# Altium PCB LED_SEQUENCER.PcbDoc
Units mm, origin at the board's own origin, x right, y up, seen from the top; angles counter-clockwise.
Board outline 51.5 x 28.5 mm, 2 copper layers (Top Layer, Bottom Layer), stack 1.671 mm thick; 28 components, 26 nets, 77 pads, 14 vias.
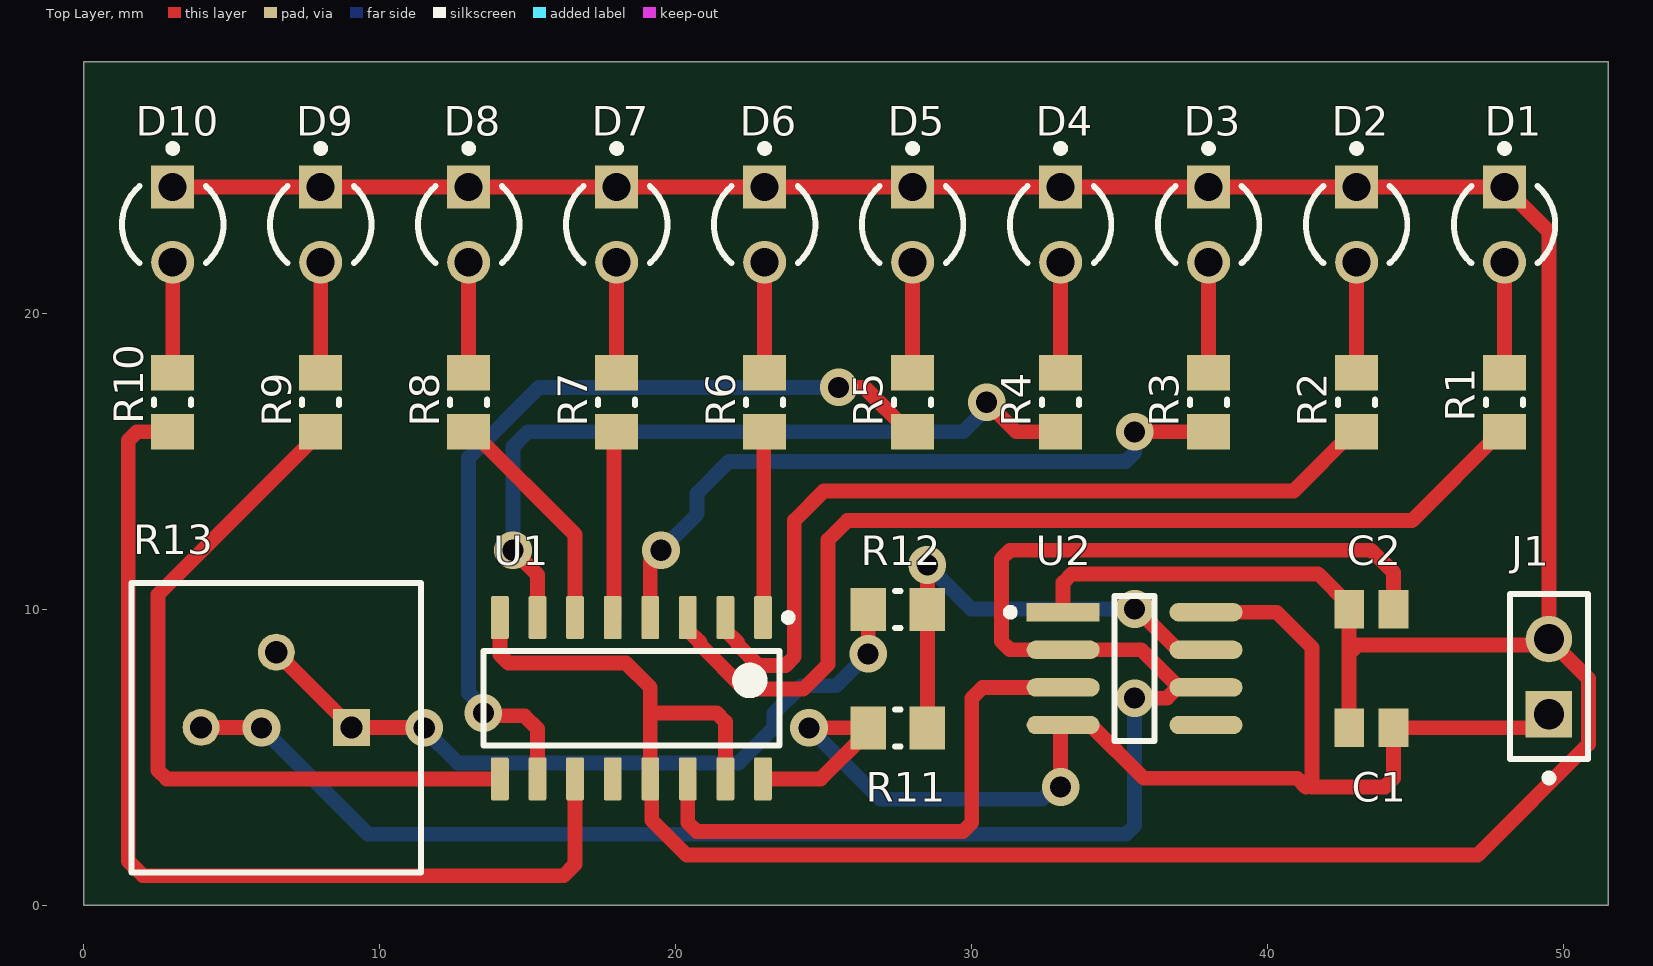
[diagram p0: Top Layer view]
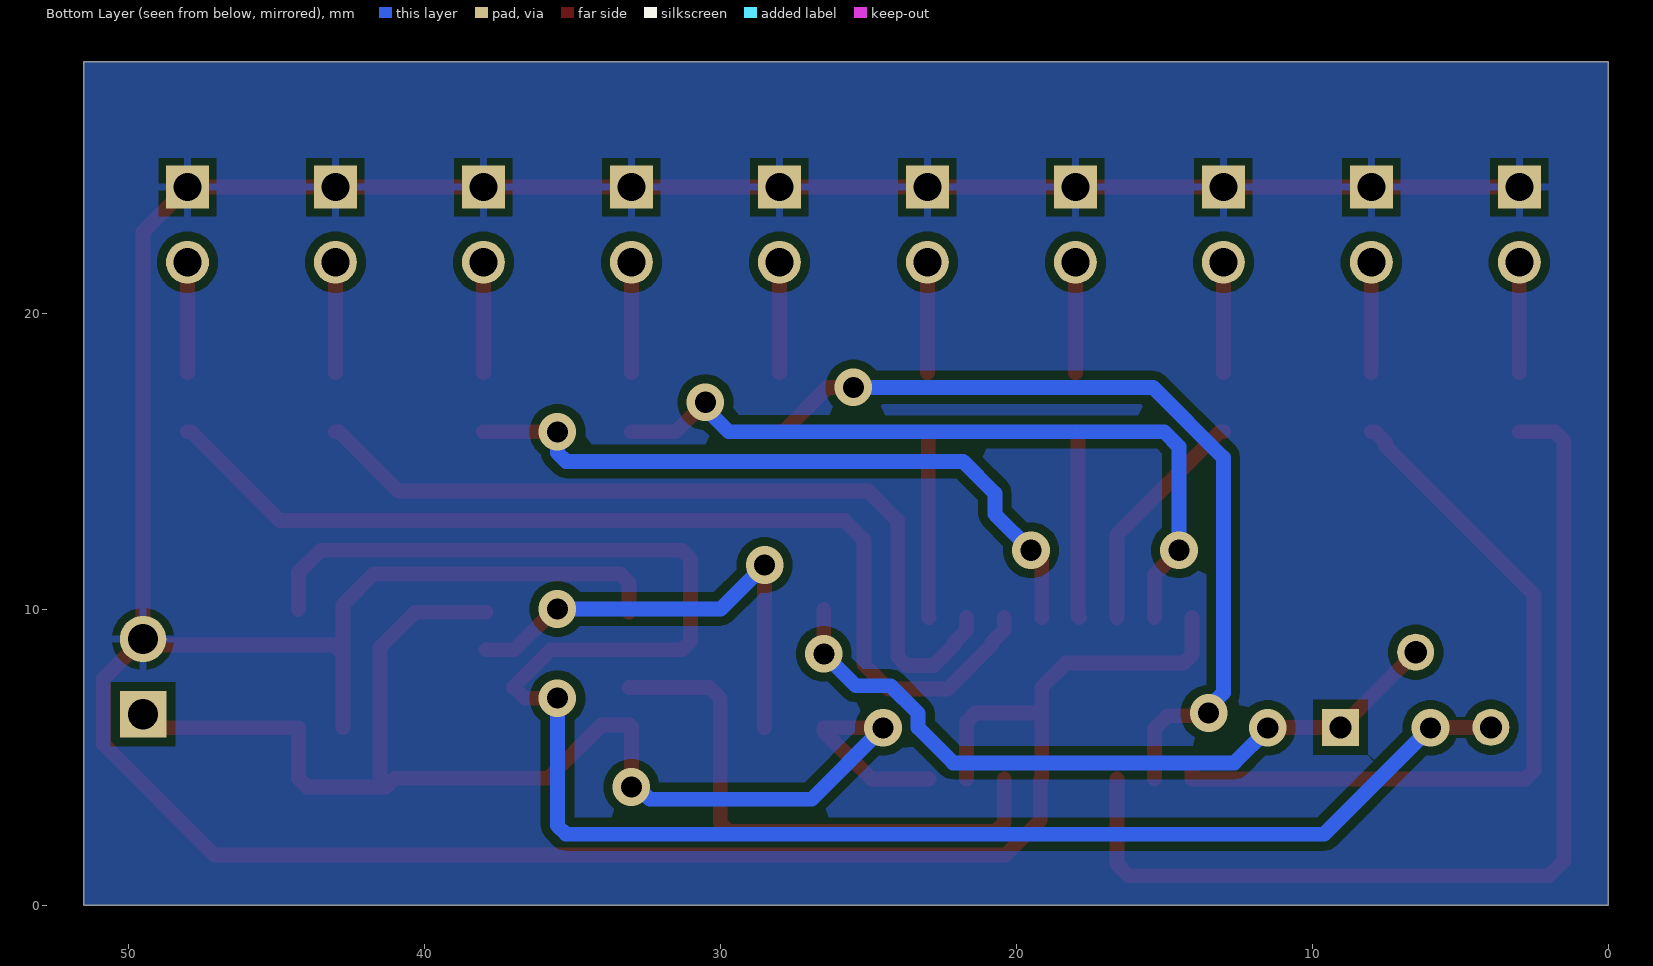
[diagram p1: Bottom Layer view, seen from below]
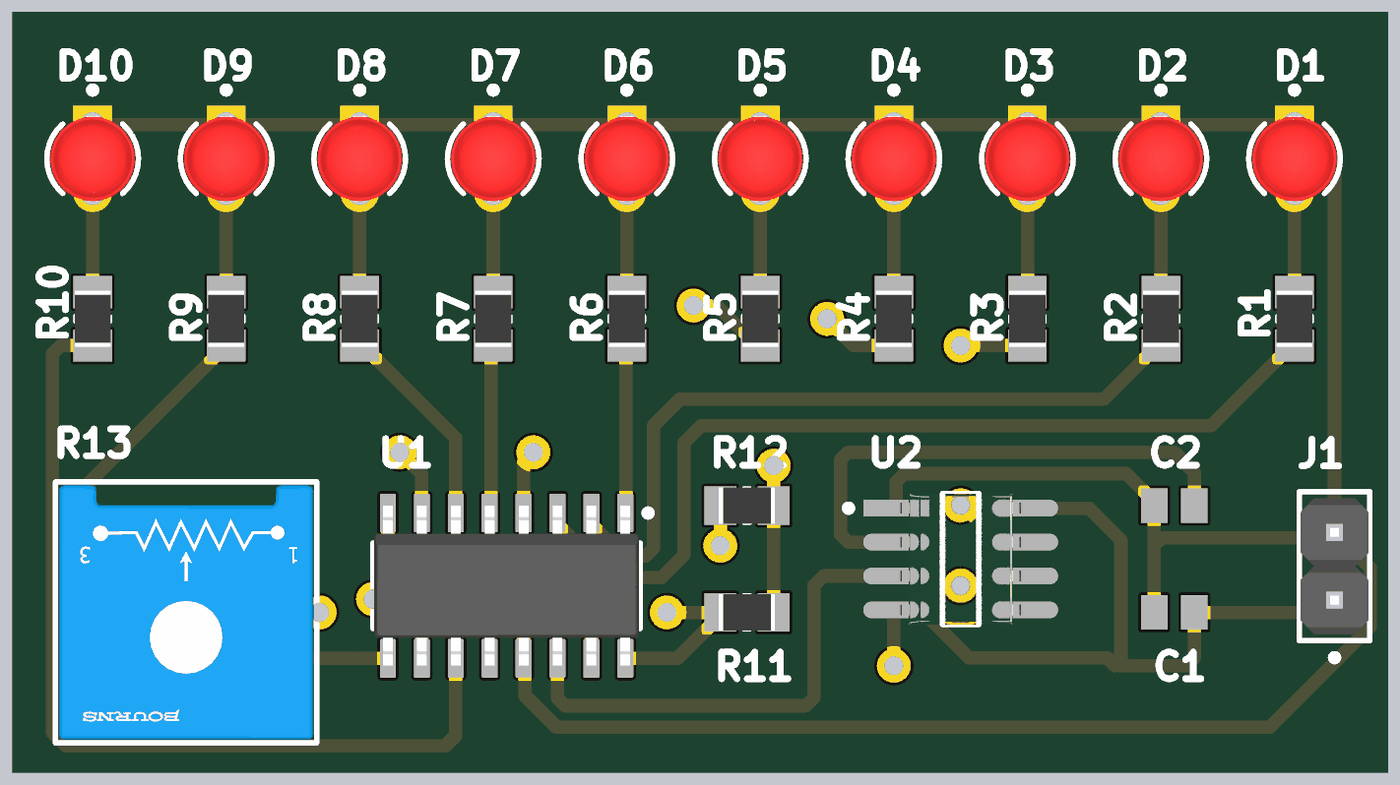
[diagram p2: 3D render of the assembled board from above, using the file's embedded part models]

## Layer stack, top to bottom
Top Solder: solder mask 0.0102, Solder Resist, Dk 3.5
Top Layer: signal copper 0.0356
Dielectric 1: dielectric 1.6, FR-4, Dk 4.8
Bottom Layer: signal copper 0.0356
Bottom Solder: solder mask 0.0102, Solder Resist, Dk 3.5

## Board outline
0,28.5 51.5,28.5 51.5,0 0,0

## Design rules (kind name [scope] priority, off if disabled: settings)
Clearance [All] p1: gap=0.3 ignorepadtopadclearanceinfootprint=FALSE
PolygonConnect [All] p1: connectstyle=Relief reliefconductorwidth=0.254 reliefentries=4 polygonreliefangle="90 Angle" airgapwidth=0.254
RoutingVias [All] p1: holewidth=0.3 width=0.6 viastyle="Through Hole" minholewidth=0.3 minwidth=0.6 maxholewidth=0.3 maxwidth=0.6
SilkToSolderMaskClearance [IsPad] p1: minsilkscreentomaskgap=0.1 clearancetoexposedcopper=TRUE
SolderMaskExpansion [All] p1: expansion=0.102 istentingtop=FALSE
SupplyNets "Schematic Supply Nets_1" [InNet('GND')] p1: voltage=0.000
SupplyNets "Schematic Supply Nets" [InNet('VCC')] p2: voltage=0.000
UnRoutedNet [All] p1: checkbadconnections=TRUE
Width [All] p1: maxlimit=1 minlimit=0.3 preferedwidth=0.5
28 further rules are at their usual default settings.

## Components (designator, comment, footprint, x,y, rotation, side; value= is the part's Value field where it differs from the comment)
C1 "GRM21BR71H105KA12L" CAPC2013X135X45LL10T25 43.5,6 r0 top
C2 "GRM21BR71H105KA12L" CAPC2013X135X45LL10T25 43.5,10 r0 top
D1 "HLMP-1301" FP-HLMP-1301-MFG 48,23 r270 top
D2 "HLMP-1301" FP-HLMP-1301-MFG 43,23 r270 top
D3 "HLMP-1301" FP-HLMP-1301-MFG 38,23 r270 top
D4 "HLMP-1301" FP-HLMP-1301-MFG 33,23 r270 top
D5 "HLMP-1301" FP-HLMP-1301-MFG 28,23 r270 top
D6 "HLMP-1301" FP-HLMP-1301-MFG 23,23 r270 top
D7 "HLMP-1301" FP-HLMP-1301-MFG 18,23 r270 top
D8 "HLMP-1301" FP-HLMP-1301-MFG 13,23 r270 top
D9 "HLMP-1301" FP-HLMP-1301-MFG 8,23 r270 top
D10 "HLMP-1301" FP-HLMP-1301-MFG 3,23 r270 top
J1 "M20-9990246" FP-M20-9990246-MFG 49.5,7.73 r90 top
R1 "RC0805FR-071KL" RESC2013X60X35ML10T20 48,17 r90 top
R2 "RC0805FR-071KL" RESC2013X60X35ML10T20 43,17 r90 top
R3 "RC0805FR-071KL" RESC2013X60X35ML10T20 38,17 r90 top
R4 "RC0805FR-071KL" RESC2013X60X35ML10T20 33,17 r90 top
R5 "RC0805FR-071KL" RESC2013X60X35ML10T20 28,17 r90 top
R6 "RC0805FR-071KL" RESC2013X60X35ML10T20 23,17 r90 top
R7 "RC0805FR-071KL" RESC2013X60X35ML10T20 18,17 r90 top
R8 "RC0805FR-071KL" RESC2013X60X35ML10T20 13,17 r90 top
R9 "RC0805FR-071KL" RESC2013X60X35ML10T20 8,17 r90 top
R10 "RC0805FR-071KL" RESC2013X60X35ML10T20 3,17 r90 top
R11 "RC0805FR-071KL" RESC2013X60X35ML10T20 27.5,6 r180 top
R12 "RC0805FR-071KL" RESC2013X60X35ML10T20 27.5,10 r0 top
R13 "3386P-1-104LF" FP-3386P-MFG 6.5,6 r180 top
U1 "CD4017BM" D0016A_N 18.5,7 r270 top
U2 "NE555DR" FP-D0008A-IPC_A 35.5,8 r0 top

## Footprints (in the part's own frame and the unit in brackets; to place one, negate y for a bottom-side part, rotate by r counter-clockwise, add the part's x,y. Pads: shape width x height; smd on the part's side, far side on the other; paste and mask are expansions set on the pad)
CAPC2013X135X45LL10T25 [mm] "Chip Capacitor, 2-Leads, Body 2.00x1.25mm, IPC High Density"
  rect 1x1.3 smd: 1(-0.75,0) 2(0.75,0)
  body extent -1.05,-0.67 1.05,0.68, height 1.35
D0016A_N [mm] "SOIC, 16-Leads, Body 10x4mm, Pitch 1.27mm, IPC Medium Density"
  rrect17% 1.45x0.6 smd: 1(-2.725,4.445) 2(-2.725,3.175) 3(-2.725,1.905) 4(-2.725,0.635) 5(-2.725,-0.635) 6(-2.725,-1.905) 7(-2.725,-3.175) 8(-2.725,-4.445) 9(2.725,-4.445) 10(2.725,-3.175) 11(2.725,-1.905) 12(2.725,-0.635) 13(2.725,0.635) 14(2.725,1.905) 15(2.725,3.175) 16(2.725,4.445)
  silkscreen extent -2.85,-5 1.6,5.42, body extent -3,-4.95 3,4.95, height 1.59
FP-3386P-MFG [mm]
  rect 1.25x1.25 hole 0.75 paste-2539.97 mask+0: 1(-2.54,-0.015)
  round 1.25 hole 0.75 paste-2539.97 mask+0: 2(0,-2.555) 3(2.54,-0.015)
  silkscreen extent -4.89,-4.89 4.89,4.89, body extent -4.99,-4.99 4.99,4.99, height 0.25
FP-D0008A-IPC_A [mm]
  rect 2.469x0.622 smd paste+0 mask+0: 1(-2.414,1.905)
  rrect100% 2.469x0.622 smd paste+0 mask+0: 2(-2.414,0.635) 3(-2.414,-0.635) 4(-2.414,-1.905) 5(2.414,-1.905) 6(2.414,-0.635) 7(2.414,0.635) 8(2.414,1.905)
  silkscreen extent -4.32,-2.45 0.68,2.45, body extent -4.15,-2.95 4.15,2.95, height 0.25
FP-HLMP-1301-MFG [mm]
  rect 1.45x1.45 hole 0.95 paste-2539.97 mask+0: 1(-1.27,0)
  round 1.45 hole 0.95 paste-2539.97 mask+0: 2(1.27,0)
  silkscreen extent -2.7,-1.71 1.3,1.71, body extent -2.22,-2.22 2.22,2.22, height 0.25
FP-M20-9990246-MFG [mm]
  rect 1.57x1.57 hole 1.02 paste-2539.97 mask+0: 1(-1.27,0)
  round 1.57 hole 1.02 paste-2539.97 mask+0: 2(1.27,0)
  silkscreen extent -3.55,-1.32 2.79,1.32, body extent -2.89,-1.42 2.89,1.42, height 0.25
RESC2013X60X35ML10T20 [mm] "Chip Resistor, 2-Leads, Body 2.1x1.35mm, IPC Low Density"
  rect 1.2x1.45 smd: 1(-1,0) 2(1,0)
  silkscreen extent -0.1,-0.63 0.1,0.63, body extent -1.05,-0.68 1.05,0.67, height 0.6

## Part data
C1 C2: library part CMP-1036-04761-2, Manufacturer=Murata, Part Number=GRM21BR71H105KA12L
D1 D2 D3 D4 D5 D6 D7 D8 D9 D10: library part CMP-18399-000007-1, "LED RED DIFFUSED T-1 T/H", Colour=Red, Forward Current=10mA, Forward Voltage=1.9V, Manufacturer=Broadcom, Max Junction Temp=+110°C, Package=0, Reverse Voltage=5V, Temperature="-40°C to +100°C", Temperature Range High=+100°C, Temperature Range Low=-40°C, Automotive=No, Category=Diode, ComponentLink2Description=Datasheet, ComponentLink2URL=https://docs.broadcom.com/docs/AV02-1555EN, Device Class L1=Optoelectronics, Device Class L2=LEDs, Device Class L3=unset, Digikey Description="LED RED DIFFUSED T-1 T/H", Lead Free=Yes, Led Orientation=Straight, Luminous Intensity=3.4mcd, Manufacturer Part Number=HLMP-1301, Mouser Description="Standard LEDs - Through Hole Red Diffused 635nm 3.4mcd", Octopart=https://octopart.com/hlmp-1301-broadcom-71130345, Peak Emmision Wavelength=635nm, RoHS=TRUE, Viewing Angle=60°, Wavelength=626nm
J1: library part CMP-15831-000009-1, "CONN HEADER VERT 2POS 2.54MM", Current Rating=3A, Manufacturer=Harwin, Temperature="-40°C to +105°C", Temperature Range High=+105°C, Temperature Range Low=-40°C, Automotive=No, Category=Conn, ComponentLink2Description=Datasheet, ComponentLink2URL=https://cdn.harwin.com/pdfs/M20-999.pdf, Conn Gender=Male, Conn Orientation=Vertical, Contact Material=Tin,Nickel, Device Class L1=Connectors, Device Class L2="Headers and Wire Housings", Device Class L3=unset, Digikey Description="CONN HEADER VERT 2POS 2.54MM", Height=8.99mm, Lead Free=Yes, Manufacturer Part Number=M20-9990246, Mouser Description="2.54mm (0.1\") Pitch SIL Vertical PC Tail Pin Header, 6.1mm mating pin height, tin, 2 contacts", Number Of Contacts=2, Number Of Rows=1, Octopart=https://octopart.com/m20-9990246-harwin-2590635, Package=M20-9990246, Pitch=2.54mm, RoHS=TRUE
R1 R2 R3 R4 R5 R6 R7 R8 R9 R10 R11 R12: library part CMP-2100-03671-1, "Chip Resistor, 1 KOhm, +/- 1%, 125 mW, -55 to 155 degC, 0805 (2012 Metric), RoHS, Tape and Reel", Case Code (Imperial)=0805, Case Code (Metric)=2012, Manufacturer=Yageo, Max Operating Temperature=155degC, Max Power Dissipation=125mW, Min Operating Temperature=-55degC, Package Description="2-Pin Surface Mounted Device, Body 2 x 1.25 mm", Package Quantity=1, Resistance=1KOhm, Temperature Coefficient=100ppm/degreesC, Tolerance=1%, Voltage Rating=150V, Case/Package=0805, Composition=ThickFilm, Datasheet URL=http://www.yageo.com/NewPortal/yageodocoutput?fileName=/pdf/R-Chip/PYu-RC_Group_51_RoHS_L_5.pdf, Datasheet Version="Rev. 5, 10/2016", Depth=1.25mm, Height=0.024inch, Lead Free=LeadFree, Length=0.079inch, Manufacturer URL=http://www.yageo.com/, Military Standard=Not, Number of Pins=2, Number of Terminations=2, Package Reference=0805, Packaging=TapeandReel, Power Rating=125mW, REACH SVHC=Unknown, RoHSCompliant=true, Termination=SMD/SMT, Voltage Rating (DC)=150V, Width=0.049inch
R13: library part CMP-2000-05592-8, "TRIMMER 100K OHM 0.5W PC PIN TOP", Color=Blue, Manufacturer Series=3386, Max Operating Temperature=125°C, Max Power Dissipation=500mW, Min Operating Temperature=-55°C, Package Quantity=100, Resistance=100kR, Resistance Law=Linear, Resistance Tolerance=10%, Resistor Type=Cermet, Temperature Coefficient=100ppm/°C, Voltage Rating=300V, Actuator Orientation=Vertical, Actuator Type=SCREW, Contact Plating=Tin, Depth=9.53mm, Height=4.83mm, Lead Free="Contains Lead", Length=9.53mm, Military Standard=Not, Mount="Through Hole", Number of Pins=3, Number of Terminals/Pins=3, Number of Turns=1, Packaging=Rail/Tube, Power Rating=500mW, Radiation Hardening=No, Reach SVHC Compliant=Yes, RoHS Compliant=Yes, Series="Trimpot® 3386 - Sealed", Taper=Linear, Technology=CERMET, Terminal Finish=Tin, Termination=Pin, Tolerance=10%, Type=Potentiometer, Weight=0.03oz, Width=9.53mm
U1: library part CMP-1623-00071-2, "CMOS Decade Counter with 10 Decoded Outputs, D0016A, TUBE", F @ Nom Voltage(Max)(Mhz)=8, Generic Part Number=CD4017B, ICC @ Nom Voltage(Max)(mA)=0.03, Manufacturer="Texas Instruments", Operating Temperature Range(C)="-55 to 125", Rating=Military, tpd @ Nom Voltage(Max)(ns)=270, Voltage(Nom)(V)=10, Bits(#)=10, Code_JEDEC="MS-012 variation AC", DatasheetVersion=SCHS027C, Function=Counter, Input Type=CMOS, Inputs=1, Output Drive (IOL/IOH)(Max)(mA)=1.5/-1.5, Output Type=CMOS, PackageReference=D0016A, Schmitt Trigger=No, Technology Family=CD4000, Type=Decade, VCC(Max)(V)=18, VCC(Min)(V)=3
U2: library part CMP-1685-00007-2, "IC OSC SGL TIMER 100KHZ 8-SOIC", Case/Package=SOIC, Frequency=100kHz, High Level Output Current=-200mA, Low Level Output Current=200mA, Max Operating Temperature=70°C, Max Supply Voltage=16V, Min Operating Temperature=0°C, Min Supply Voltage=4.5V, Operating Supply Current=10mA, Package Quantity=2500, Quiescent Current=15mA, Contact Plating=Gold, Height=1.58mm, Lead Free="Lead Free", Length=4.9mm, Mount="Surface Mount", Number of Pins=8, Number of Timers/Counters=1, Packaging="Tape and Reel", Radiation Hardening=No, REACH SVHC="No SVHC", Weight=0.002561oz, Width=3.91mm

## Via types
v1: diameter 1.27, hole 0.711, Top Layer to Bottom Layer, 14 vias

## Nets (pads, with @x,y where several pads share a name; then routed paths per layer and width w, separated by ;. In a path a pad name is that pad's centre, name@x,y a point inside that pad or via, vN(x,y) a via of type N, cw(c..) or ccw(c..) an arc to the next point about the centre after c; other vN are vias at no path point)
GND: C1.1 C2.1 D1.1 D2.1 D3.1 D4.1 D5.1 D6.1 D7.1 D8.1 D9.1 D10.1 J1.2 U1.8 U1.13 U1.15 U2.1 | length 136.9
  Top Layer w0.5: D10.1 D9.1 D8.1 D7.1 D6.1 D5.1 D4.1 D3.1 D2.1 D1.1 49.5,22.77 J1.2 ; U1.8 14.055,8.478 14.348,8.185 18.315,8.185 19.135,7.365 19.135,6.5 ; U1.15 21.675,6.207 21.382,6.5 19.135,6.5 ; U2.1 33.086,10.907 33.379,11.2 41.7,11.2 42.75,10.15 42.75,8.5 ; C1.1 42.75,8.5 ; 19.135,6.5 U1.13 19.185,4.225 19.185,2.882 20.367,1.7 47.088,1.7 50.835,5.447 50.835,7.665 J1.2 ; 42.75,8.5 43.05,8.8 49.3,8.8 J1.2
NetC2_2: C2.2 R13.3 U2.2 U2.6 | length 63.5
  Top Layer w0.5: R13.3 3.968,6.008 5.993,6.008 v1(6,6) ; v1(35.5,7) 36.592,7 36.957,7.365 36.99,7.365 35.72,8.635 U2.2 31.293,8.635 31,8.928 31,11.707 31.293,12 43.5,12 44.25,11.25 C2.2
  Bottom Layer w0.5: v1(6,6) 9.599,2.401 35.207,2.401 35.5,2.694 v1(35.5,7)
NetD1_2: D1.2 R1.2 | length 3.7
  Top Layer w0.5: R1.2 D1.2
NetD2_2: D2.2 R2.2 | length 3.7
  Top Layer w0.5: R2.2 D2.2
NetD3_2: D3.2 R3.2 | length 3.7
  Top Layer w0.5: R3.2 D3.2
NetD4_2: D4.2 R4.2 | length 3.7
  Top Layer w0.5: R4.2 D4.2
NetD5_2: D5.2 R5.2 | length 3.7
  Top Layer w0.5: R5.2 D5.2
NetD6_2: D6.2 R6.2 | length 3.7
  Top Layer w0.5: R6.2 D6.2
NetD7_2: D7.2 R7.2 | length 3.7
  Top Layer w0.5: R7.2 D7.2
NetD8_2: D8.2 R8.2 | length 3.7
  Top Layer w0.5: R8.2 D8.2
NetD9_2: D9.2 R9.2 | length 3.7
  Top Layer w0.5: R9.2 D9.2
NetD10_2: D10.2 R10.2 | length 3.7
  Top Layer w0.5: R10.2 D10.2
NetR1_1: R1.1 U1.3 | length 35
  Top Layer w0.5: U1.3 20.405,9.3 20.824,8.881 20.824,8.804 22.32,7.307 24.307,7.307 25.146,8.146 25.146,12.354 25.793,13 44.875,13 47.875,16 R1.1
NetR2_1: R2.1 U1.2 | length 28.3
  Top Layer w0.5: U1.2 21.675,9.3 22.094,8.881 22.094,8.804 22.79,8.107 23.707,8.107 24,8.4 24,13 25,14 40.875,14 42.875,16 R2.1
NetR3_1: R3.1 U1.4 | length 23.4
  Top Layer w0.5: U1.4 19.135,11.635 v1(19.5,12) ; v1(35.5,16) R3.1
  Bottom Layer w0.5: v1(19.5,12) 20.72,13.22 20.72,13.927 21.793,15 35.207,15 35.5,15.293 v1(35.5,16)
NetR4_1: R4.1 U1.7 | length 25.8
  Top Layer w0.5: v1(14.5,12) 15.325,11.175 U1.7 ; v1(30.5,17) 31.5,16 R4.1
  Bottom Layer w0.5: v1(14.5,12) 14.5,15.5 15,16 29.707,16 30.5,16.793 v1(30.5,17)
NetR5_1: R5.1 U1.10 | length 29.2
  Top Layer w0.5: v1(13.5,6.5) 13.593,6.407 14.885,6.407 15.325,5.967 U1.10 ; v1(25.5,17.5) 26.375,17.5 27.875,16 R5.1
  Bottom Layer w0.5: v1(13.5,6.5) 13.5,6.678 13,7.178 13,15.131 15.369,17.5 v1(25.5,17.5)
NetR6_1: R6.1 U1.1 | length 6.3
  Top Layer w0.5: U1.1 22.972,9.753 22.972,15.972 R6.1
NetR7_1: R7.1 U1.5 | length 6.3
  Top Layer w0.5: U1.5 17.915,9.775 17.915,15.915 R7.1
NetR8_1: R8.1 U1.6 | length 7.8
  Top Layer w0.5: R8.1 13.125,16 16.595,12.53 U1.6
NetR9_1: R9.1 U1.9 | length 25.9
  Top Layer w0.5: R9.1 7.875,16 7.525,15.65 7.525,15.525 2.5,10.5 2.5,4.568 2.793,4.275 U1.9 U1.9@14.055,4.7
NetR10_1: R10.1 U1.11 | length 34.2
  Top Layer w0.5: R10.1 1.793,16 1.5,15.707 1.5,1.5 2,1 16.207,1 16.595,1.388 U1.11
NetR11_1: R11.1 R12.2 U2.7 | length 16.1
  Top Layer w0.5: R11.1 R12.2 v1(28.5,11.5) ; v1(35.5,10.015) 35.577,10.015 36.957,8.635 U2.7
  Bottom Layer w0.5: v1(28.5,11.5) 29.985,10.015 v1(35.5,10.015)
NetR12_1: R12.1 R13.1 R13.2 | length 24.9
  Top Layer w0.5: R13.2 9.048,6.008 11.492,6.008 v1(11.5,6) ; v1(26.5,8.5) R12.1
  Bottom Layer w0.5: v1(11.5,6) 11.5,5.942 12.627,4.815 22.13,4.815 23.315,6 23.315,6.491 24.246,7.422 25.422,7.422 v1(26.5,8.5)
NetU1_14: U1.14 U2.3 | length 18.8
  Top Layer w0.5: U1.14 20.405,2.793 20.698,2.5 29.707,2.5 30,2.793 30,7 30.365,7.365 U2.3
VCC: C1.2 J1.1 R11.2 U1.16 U2.4 U2.8 | length 46
  Top Layer w0.5: U1.16 24.9,4.275 26.5,5.875 R11.2 v1(24.5,6) ; v1(33,4) 33,6.039 33.056,6.095 34.01,6.095 35.812,4.293 41,4.293 41.293,4 ; U2.8 40.302,9.905 41.5,8.707 41.5,4 43.957,4 44.25,4.293 C1.2 49.04,6 J1.1
  Bottom Layer w0.5: v1(24.5,6) 26.914,3.586 32.378,3.586 32.792,4 v1(33,4)
pads on no net: U1.12 U2.5

## Polygon pours and split planes (outlines as drawn)
GND on Bottom Layer "GND_L02_P002" (solid, pour order 2): 0,0 51.5,0 51.5,28.5 0,28.5